# EAGLE board alert-rev8-3v (EAGLE 7.4.0)
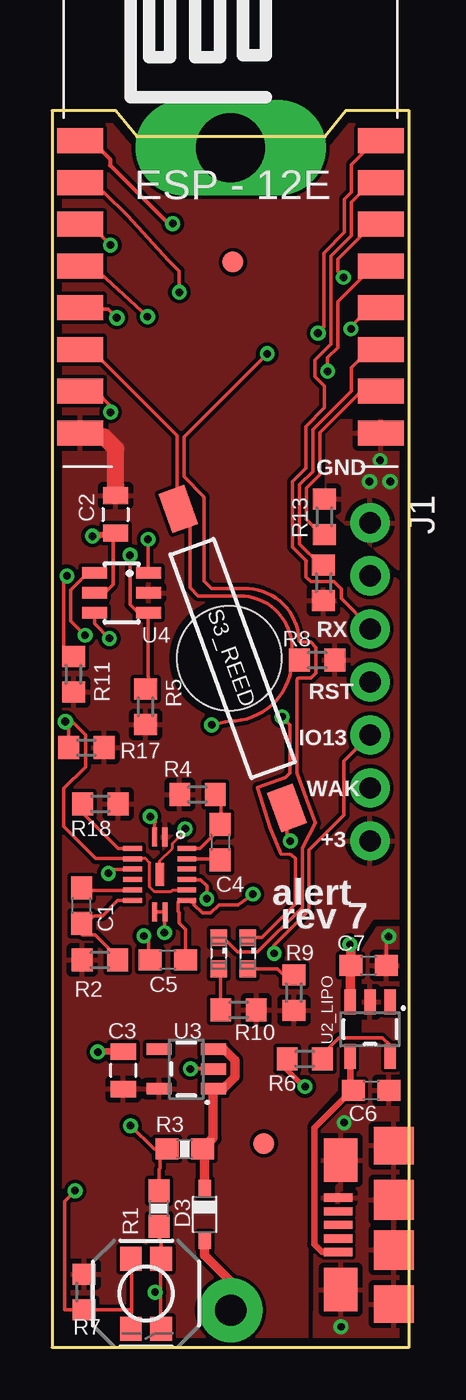
[diagram p0: board, top side]
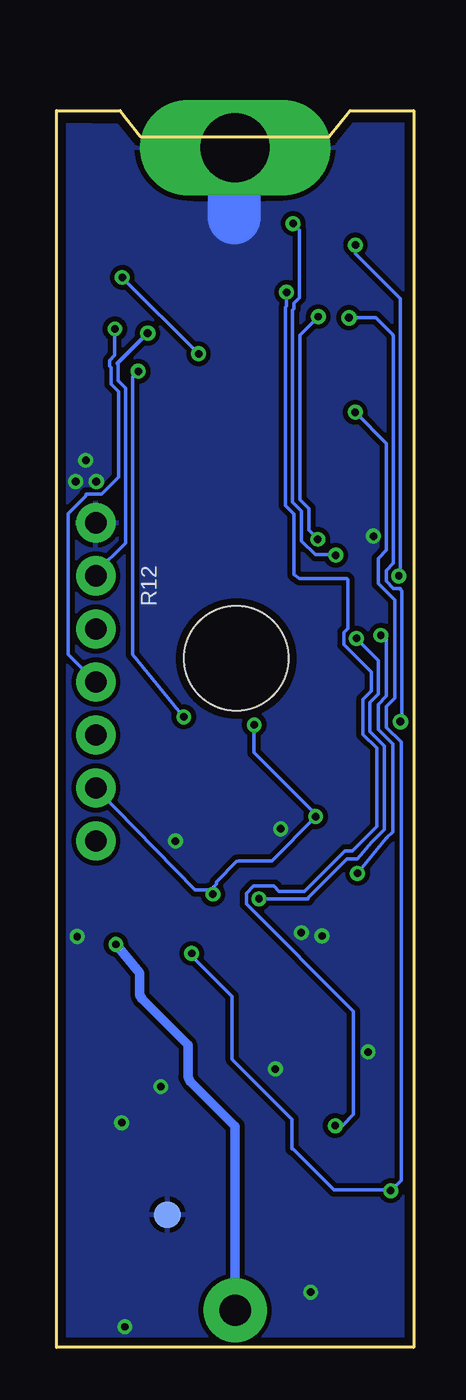
[diagram p1: board, bottom side, seen from below]

Size 17.12 x 59.25 mm. Coordinates in mm from the lower left corner, seen from the top.
Outline: 0,0 17.12,0 17.12,59.25 14.07,59.25 13.08,57.99 4.06,57.99 3.05,59.25 0,59.25 0,0
Copper layers (1*16): Top 0.0356mm / dielectric 1.5011mm / Bottom 0.0356mm
Design rules "oshpark-2layer *": minimum track width 6mil, minimum drill 13mil, track to track 6mil, track to pad 6mil, pad to pad 6mil, via to via 6mil, smd to smd 6mil, copper to edge 15mil, drill to drill 6mil, minimum pad ring 7mil, minimum via ring 7mil, stop-mask expansion 2.5mil, vias tented up to drill 30mil, thermal gap 10mil
Holes 5 mm at 8.5,33

## Footprints (pad centres in the part's own frame; a part is rotated, then mirrored left to right if it is on the bottom)
C0603 = smd 1.1 x 1: 1 -0.85,0; 2 0.85,0
0805 = smd 0.8 x 1.2: 1 -0.9,0; 2 0.9,0
SOD323_ST = smd 0.8 x 0.6: A 1.25,0; C -1.25,0
FIDUCIAL-1X2 = smd 1 x 1: 1 0,0
1X07_NO_SILK = drill 1.016 pad 1.88: 1 0,0; 2 2.54,0; 3 5.08,0; 4 7.62,0; 5 10.16,0; 6 12.7,0; 7 15.24,0
MICRO-B = smd 0.4 x 1.35: D+ 0,2.675; D- -0.65,2.675; GND 1.3,2.675; ID 0.65,2.675; VCC -1.3,2.675 | smd 1.8 x 1.9: P$1 -3.8,0; P$4 3.8,0 | smd 1.9 x 1.9: P$2 -1.2,0; P$3 1.2,0 | smd 2.1 x 1.6: P$5 -3.1,2.55; P$11 3.1,2.55
SML0603 = smd 0.8 x 0.8: A 0.75,0; C -0.75,0
0603-RES = smd 1.1 x 1: 1 -0.85,0; 2 0.85,0
R0603 = smd 1 x 1.1: 1 -0.85,0; 2 0.85,0
CT10-G1 = smd 2 x 1.3: 1 -7.62,0; 2 7.62,0
TACTILE-SWITCH-SMD = smd 1.15 x 1.05: 1 -1.675,0.725; 2 -1.675,-0.725; 3 1.675,0.725; 4 1.675,-0.725
PAD.03X.05 = smd 1.27 x 1.27: P$1 0,0
ESP12E-SMD = smd 2.2 x 1.2: ADC -7.3,3.8; CH_PD -7.3,1.8; GND 7.1,-8.2; GPIO0 7.1,-2.2; GPIO2 7.1,-4.2; GPIO4 7.1,-0.2; GPIO5 7.1,1.8; GPIO12 -7.3,-4.2; GPIO13 -7.3,-6.2; GPIO14 -7.3,-2.2; GPIO15 7.1,-6.2; GPIO16 -7.3,-0.2; RESET -7.3,5.8; RXD0 7.1,3.8; TXD0 7.1,5.8; VCC -7.3,-8.2
DHVQFN16 = smd 0.24 x 0.9: 1!A 1.02,4.34; 2!A 1.52,0.74; GND 1.02,0.74 | smd 0.9 x 0.24: 1!Q -0.03,2.79; 1!RD -0.03,3.29; 1B -0.03,3.79; 1CEXT 2.57,3.29; 1Q 2.57,2.79; 1RC 2.57,3.79; 2!Q 2.57,2.29; 2!RD 2.57,1.79; 2B 2.57,1.29; 2CEXT -0.03,1.79; 2Q -0.03,2.29; 2RC -0.03,1.29 | smd 0.4 x 1.1: PAD 1.27,2.54 | smd 0.25 x 0.9: VCC 1.52,4.34
SOT23-5 = smd 0.55 x 1.2: 1 -0.95,-1.3; 2 0,-1.3; 3 0.95,-1.3; 4 0.95,1.3; 5 -0.95,1.3
SOT23-6 = smd 0.55 x 1.2: 1 0.95,1.3; 2 0,1.3; 3 -0.95,1.3; 4 -0.95,-1.3; 5 0,-1.3; 6 0.95,-1.3
BATTERY-AA-PTH = drill 1.5 pad 3.048: P$1 -27.85,0 | drill 3.302 pad 4.572 long: P$2 27.85,0

## Placement (x,y rotation side)
C1  100nf  [C0603]  1.42,21.15 90 top
C2  47uf  [0805]  3.04,39.9 270 top
C3  47uf  [0805]  3.41,13.27 90 top
C4  100nf  [C0603]  8.05,24.19 270 top
C5  100nf  [C0603]  5.55,18.56 180 top
C6  4.7uf  [C0603]  15.29,12.32 0 top
C7  4.7uf  [C0603]  15.16,18.29 0 top
D3  BAT60J  [SOD323_ST]  7.31,6.36 270 top
FD1  FIDUCIAL1X2  [FIDUCIAL-1X2]  10.15,9.77 0 top
FD2  FIDUCIAL1X2  [FIDUCIAL-1X2]  8.66,51.99 0 top
J1  [1X07_NO_SILK]  15.24,39.5 270 top
J3  [MICRO-B]  16.38,5.87 90 top
LED2  [SML0603]  9.38,18.88 270 top
LED3  [SML0603]  7.98,18.88 270 top
R1  1M  [0603-RES]  5.13,6.65 90 top
R2  200k  [R0603]  2.29,18.56 180 top
R3  1M  [0603-RES]  6.35,9.5 0 top
R4  200k  [R0603]  6.97,26.49 180 top
R5  10k  [R0603]  4.48,30.69 270 top
R6  2k  [R0603]  12.12,13.82 0 top
R7  10k  [R0603]  1.54,2.65 270 top
R8  200k  [R0603]  12.7,32.92 0 top
R9  330ohm  [R0603]  11.59,16.99 90 top
R10  330ohm  [R0603]  8.94,16.17 180 top
R11  10k  [R0603]  1.03,32.25 270 top
R12  10k  [R0603]  13.02,36.62 90 top
R13  10k  [R0603]  13.04,39.78 270 top
R17  10k  [R0603]  1.65,28.73 0 top
R18  10k  [R0603]  2.31,26.04 0 top
S3_REED  REED-SWITCH-CT10-1530-G1  [CT10-G1]  8.65,33 290 top
S_CTRL  SWITCH-MOMENTARY-2SMD-REDUNDANT  [TACTILE-SWITCH-SMD]  4.5,2.57 270 top
TP1  TEST-POINT3X5  [PAD.03X.05]  11.81,6.35 0 bottom
U1  [ESP12E-SMD]  8.65,52 0 top
U2  74HC123N  [DHVQFN16]  3.89,20.12 0 top
U2_LIPO  MCP73831  [SOT23-5]  15.24,15.24 180 top
U3  [SOT23-5]  6.43,13.34 90 top
U4  SN74LVC1G332  [SOT23-6]  3.33,36.14 90 top
U$10  BATTERY-2TERM-PTH  [BATTERY-AA-PTH]  8.56,29.62 90 top

## Library data of the parts
C1 C4-C7 R2 R4-R13 R17 R18 = rcl
C2 C3 R1 R3 = SparkFun-Passives
D3 = diode
FD1 FD2 = SparkFun-Aesthetics
J1 J3 TP1 U1-U4 U$10 = alert
LED2 LED3 = led
S3_REED = switch-reed; MF: COTO TECHNOLOGY; MPN: CT10-1530-G1; OC_FARNELL: 1081696
S_CTRL = alert; PROD_ID: SWCH-08247
U2_LIPO = SparkFun-PowerIC; PROD_ID: IC-09995

## Nets
A_N: R13.2 U1.GPIO15
BTLD: J1.4 U1.GPIO0
CLR: R17.1 U1.GPIO14 U2.1!RD U2.2!RD
CTRL: J1.5 R7.2 S_CTRL.2 S_CTRL.4 U1.GPIO13
GND-ISO: C2.2 C3.2 C5.2 C6.2 C7.2 J1.1 J3.GND J3.P$1 J3.P$2 J3.P$3 J3.P$4 J3.P$5 J3.P$11 R1.1 R6.1 R13.1 S3_REED.2 S_CTRL.1 S_CTRL.3 TP1.P$1 U1.GND U2.2!A U2.GND U2.PAD U2_LIPO.2 U3.2 U4.2 U$10.P$2
LED2: LED2.C U1.GPIO4
LED3: LED3.C U1.GPIO5
N$1: R18.1 U2.1B
N$2: J1.3 U1.RXD0
N$3: R6.2 U2_LIPO.5
N$4: C1.1 R2.1 U2.2RC
N$5: R11.1 U1.CH_PD
N$9: C4.1 R4.1 U2.1RC
N$10: LED2.A R9.2
N$11: C4.2 U2.1CEXT
N$13: U2.1!Q U4.1
N$14: U2.2!Q U4.3
N$16: LED3.A R10.2
N$18: R12.2 U1.GPIO2
N$23: C1.2 U2.2CEXT
REED: C5.1 J1.6 R8.1 S3_REED.1 U1.GPIO12 U2.1!A U2.2B
RESET: R5.1 U1.RESET U4.4
RTC_RST: U1.GPIO16 U4.6
TX: J1.2 U1.TXD0
V_BATT: C7.1 D3.A U2_LIPO.3 U$10.P$1
V_BATT_DIV: R1.2 R3.1 U1.ADC
V_BATT_PROT: D3.C R3.2 U3.1 U3.3
VCC: C6.1 J3.VCC U2_LIPO.4
VCC-ISO: C2.1 C3.1 J1.7 R2.2 R4.2 R5.2 R7.1 R8.2 R9.1 R10.1 R11.2 R12.1 R17.2 R18.2 U1.VCC U2.VCC U3.5 U4.5

## Tracks (layer width: path | path; a pad name or v marks a point on that pad's centre or on a via)
A_N
  Top 0.178: U1.GPIO15 14.81,45.8 12.83,43.81 12.83,41.83 12.8,41.78 12.19,41.17 12.19,39.65 12.9,38.94 R13.2
BTLD  (via drill 0.36)
  Top 0.178: 15.14,49.81 U1.GPIO0 | 15.11,49.73 U1.GPIO0 | v14.33,48.79 14.33,48.9 15.09,49.66 U1.GPIO0
  Bottom 0.178: v14.33,48.79 14.33,47.52 14.58,47.27 14.58,47.02 14.5,46.94 14.5,46.15 14.15,45.8 14.15,41.68 14.96,40.87 15.7,40.87 15.72,40.79 16.56,39.95 16.56,33.2 J1.4
CLR  (via drill 0.38)
  Top 0.152: U2.1!RD 4.47,23.42 4.67,23.22 4.67,22.05 4.9,21.82 5.69,21.82 5.77,21.89 6.45,21.89 U2.2!RD
  Top 0.178: 1.98,49.81 1.37,49.81 U1.GPIO14 2.01,49.73 2.69,49.73 v3.1,49.33 | U2.1!RD 3.79,23.42 2.08,23.42 0.56,24.94 0.56,26.77 1.6,27.81 1.6,29.34 0.96,29.97 0.9,30 0.7,30 v0.64,29.97 0.7,29.9 0.8,29.8 0.8,28.8 R17.1 0.81,28.73
  Bottom 0.178: v3.1,49.33 1.8,49.33 0.99,48.51 0.96,48.44 0.96,37.57 1.32,37.21 1.32,36.7 0.96,36.35 0.64,36.35 0.61,36.27 0.56,36.22 0.56,30.05 v0.64,29.97
CTRL  (via drill 0.36, 0.36 pad 0.71)
  Top 0.178: 1.37,45.8 U1.GPIO13 2.1,45.8 2.8,45.1 v2.8,44.8 | 3.7,4.3 S_CTRL.2 3.8,4.2 3.8,1.8 | 3.8,1.8 3.8,0.9 S_CTRL.4 | v1.1,7.5 0.6,7 0.6,1.8 1.8,1.8 R7.2 1.9,1.8 3.8,1.8 | v10.64,18.87 10.64,19.25 12.32,20.93 12.32,23.82 13.99,25.5 13.99,28.09 J1.5
  Bottom 0.178: v2.8,44.8 1.3,43.3 1.3,38.2 1.7,37.8 1.7,36.6 0.9,35.8 0.9,31.1 1.3,30.7 1.3,29.7 0.6,29 0.6,8 v1.1,7.5 | 1.07,7.42 v1.1,7.5 | 10.64,18.8 v10.64,18.87 10.62,18.72 8.71,16.82 8.71,13.84 8.69,13.77 5.84,10.92 5.84,9.5 5.77,9.47 3.83,7.54 1.17,7.54 v1.1,7.5
GND-ISO  (via drill 0.36, 0.36 pad 0.53, 0.36 pad 0.71, 0.38)
  Top 0.152: v6.38,24.84 6.38,24.74 5.77,24.13 5.77,23.9 5.16,23.29 U2.PAD
  Top 0.178: 3.2,38.86 C2.2 2.92,38.73 2.92,36.55 2.52,36.14 U4.2 | U2.2!A 5.38,20.85 4.93,20.85 U2.GND | 5.41,20.78 U2.2!A | 5.2,2.62 5.2,0.9 S_CTRL.3 | 5.2,2.62 5.2,4.2 5.21,4.24 S_CTRL.1 5.23,4.32 5.23,5.13 5.13,5.23 R1.1 | 5.03,18.49 C5.2 | 4.67,18.64 C5.2 | v5.38,19.86 5.38,20.73 U2.2!A | C5.2 4.62,18.69 4.62,19.56 v4.39,19.71 | S3_REED.2 11.26,24.42 v11.42,24.26 | 5.2,2.62 4.95,2.62 v4.94,2.64 | v16.13,19.68 16.01,19.56 C7.2
  Top 0.203: U3.2 v6.63,13.34
  Top 0.229: v12.12,12.49 v12.12,12.5 12.04,12.5 11.28,13.26 R6.1
  Top 0.305: C2.2 1.93,38.87 v1.93,38.86 | C3.2 2.18,14.17 v2.18,14.15
  Top 0.406: 15.27,43.79 U1.GND
  Bottom 2.54: U$10.P$2 8.61,57.48 8.61,54.1
  other vias: 15.72,42.49 16.21,41.48 15.21,41.48 14,10.76 13.85,0.98
  pour Bottom (isolate 0.229): 0,58.6 3.51,58.6 7.11,54.81 10.57,54.81 13.72,58.55 17.12,58.6 17.12,0 0,0
  pour Top: 13.18,44.4 13.14,40.26 17.12,36.82 17.12,44.4
  pour Top: 17.12,20.09 17.12,0 12.57,0 12.65,10.49 14.58,12.37 14.58,14.43 14.91,14.43 14.91,19.02 15.62,20.09
LED2  (via drill 0.36)
  Top 0.178: U1.GPIO4 | 15.24,51.79 15.67,51.79 U1.GPIO4 | 15.21,51.71 U1.GPIO4 | 15.19,51.64 U1.GPIO4 | 9.4,19.63 LED2.C 9.47,19.63 10.06,19.63 11.66,21.23 11.66,23.42 11.48,23.6 11.4,23.62 10.97,23.65 10.44,24.92 9.86,26.82 11.18,27.3 11.4,27.51 11.4,29.82 v11.02,30.2 | v13.21,46.76 13.21,47.42 13.69,47.9 13.69,50.09 15.16,51.56 U1.GPIO4
  Bottom 0.178: v11.02,30.2 13.49,33.2 13.49,46.48 v13.21,46.76
LED3  (via drill 0.36)
  Top 0.178: U1.GPIO5 | 15.24,53.8 15.67,53.8 U1.GPIO5 | LED3.C 8.03,19.66 8.18,19.66 8.89,18.95 9.86,18.95 11.99,21.08 11.99,23.9 12.01,23.98 12.62,25.12 12.19,26.26 11.73,27.51 11.73,31.95 11.76,32.03 11.84,32.05 12.39,32.05 12.65,32.31 12.65,33.53 12.39,33.78 11.99,33.78 11.84,33.83 11.84,33.88 arc90 9.17,36.35 | v10.31,47.6 6.33,43.61 6.33,41.71 7.26,40.77 7.29,40.69 7.29,36.7 7.64,36.35 9.17,36.35 | v13.97,51.26 13.69,51.54 13.69,52.12 15.21,53.65 15.21,53.72 U1.GPIO5 | 9.27,36.35 9.17,36.35
  Bottom 0.178: v13.97,51.26 v10.31,47.6
N$1
  Top 0.178: R18.1 1.47,26.04 1.47,25.6 3.17,23.9 3.83,23.9 U2.1B
N$2
  Top 0.178: 15.24,55.8 U1.RXD0 | 15.16,55.73 15.21,55.73 U1.RXD0 | U1.RXD0 15.14,55.65 14.35,54.86 14.35,53.26 13.36,52.27 13.36,48.06 12.6,47.3 12.6,46.51 13.06,46.05 13.06,45.01 12.17,44.12 12.17,42.11 11.53,41.48 11.53,38.33 12.19,37.67 12.17,37.59 12.17,36.91 12.39,36.68 13.51,36.68 13.87,36.32 13.87,35.87 15.24,34.49 J1.3
N$3
  Top 0.178: R6.2 12.95,13.82 12.95,14.05 13.74,14.83 15.82,14.83 16.18,14.48 U2_LIPO.5
N$4
  Top 0.178: R2.1 3.12,18.57 3.12,18.69 2.06,19.76 1.45,19.76 1.42,19.79 C1.1 1.5,20.34 1.65,20.34 1.96,20.65 2.03,20.68 2.41,20.68 3.15,21.41 3.83,21.41 U2.2RC
N$5  (via drill 0.36 pad 0.53)
  Top 0.178: v2.79,52.81 1.98,53.62 1.98,53.8 1.37,53.8 U1.CH_PD | v0.71,36.96 0.56,36.96 0.56,33.1 1.02,33.1 R11.1
  Bottom 0.178: v2.79,52.81 2.79,52.4 0.64,50.24 0.64,37.03 v0.71,36.96
N$9
  Top 0.178: 6.48,23.9 U2.1RC 6.5,23.9 7.1,23.9 8,24.8 C4.1 8.1,24.9 8.1,26.2 7.9,26.4 R4.1
N$10
  Top 0.178: R9.2 11.58,17.91 11.02,17.91 10.79,18.14 10.11,18.14 LED2.A
N$11
  Top 0.178: C4.2 8.26,22.96 8.23,22.99 7.7,22.99 7.7,23.4 U2.1CEXT 6.48,23.42
N$13  (via drill 0.36 pad 0.71)
  Top 0.178: v1.57,34.11 0.89,34.8 0.89,36.27 1.7,37.08 2.01,37.08 U4.1 | 3.83,22.91 U2.1!Q 3.8,22.9 2.8,22.9 2.7,22.8 v2.7,22.71
  Bottom 0.178: v2.7,22.71 1.3,24.4 | 1.3,24.4 1.29,24.41 | 1.3,24.4 1,24.7 1,28.9 1.7,29.6 1.7,30.8 1.3,31.2 1.3,33.9 1.5,34.1 v1.57,34.11
N$14  (via drill 0.36 pad 0.71)
  Top 0.178: v7.42,21.49 7.42,22.1 7.11,22.4 6.48,22.4 U2.2!Q | v2.74,33.96 2.03,34.67 U4.3
  Bottom 0.178: 5.08,21.49 5.1,21.49 | 5.1,21.49 v7.42,21.49 | 1.4,24.8 | 1.4,24.8 1.4,28.8 2.1,29.5 2.1,30.9 1.7,31.3 1.7,32.9 2.7,33.9 v2.74,33.96 | 5.1,21.49 5.1,21.5 3.2,23.4 2.7,23.4 2,24.2 1.9,24.3 1.4,24.8 | 1.4,24.8
N$16
  Top 0.178: 8.08,18.09 8.08,16.2 R10.2 | 8.13,18.14 8.08,18.09 | 8.08,18.09 8,18.11 LED3.A
N$18
  Top 0.178: R12.2 13.01,37.47 12.88,37.47 11.86,38.48 11.86,41.33 12.5,41.96 12.5,43.97 14.35,45.82 14.35,46.94 15.21,47.8 U1.GPIO2
N$23
  Top 0.178: C1.2 1.42,21.92 1.45,21.89 3.83,21.89 U2.2CEXT
REED  (via drill 0.36 pad 0.71)
  Top 0.178: U1.GPIO12 1.37,47.8 1.88,47.8 5.99,43.69 5.99,40.23 S3_REED.1 | 5.66,39.85 S3_REED.1 | 5.61,39.78 S3_REED.1 | U2.1!A 4.9,25.12 4.95,25.17 v4.7,25.43 | 6.81,21.39 6.78,21.41 6.48,21.41 U2.2B | 12,32.9 R8.1 | 6.5,40.1 6.1,40.1 S3_REED.1 | 12,33 R8.1 | 5.6,39.7 S3_REED.1 | S3_REED.1 6.34,40.16 6.6,39.9 6.6,36.4 7,36 8.98,36 arc-90 11.51,33.48 11.51,32.92 R8.1 | U2.2B 6.8,21.3 6.8,21.2 7.2,20.8 7.6,20.8 8,21.2 8.9,21.2 v9.63,21.71 | 6.76,18.44 C5.1 | U2.2B 6.4,21.39 6.1,21.39 6.04,21.34 6.04,20.88 6.1,20.83 6.1,20.32 6.4,20.02 6.4,18.64 C5.1 | 6.35,18.49 C5.1 | 6.3,18.19 6.3,18.44 C5.1 | v7.64,29.82 8.51,30 arc90 11.51,32.99 11.95,32.99 arc-90 R8.1
  Bottom 0.178: 4.7,25.5 v4.7,25.43 | v4.7,25.43 4.7,25.4 6.8,23.3 8.4,23.3 8.48,23.27 9.45,22.3 9.45,22.2 9.63,22.02 9.63,22 9.73,21.89 9.73,21.82 v9.63,21.72 v9.63,21.71 9.8,21.92 10.49,21.92 J1.6 | v7.64,29.82 7.64,28.5 4.72,25.58 v4.7,25.43
RESET  (via drill 0.36 pad 0.71)
  Top 0.178: v3.73,37.95 3.73,35.59 4.12,35.2 4.62,35.2 U4.4 | 1.91,57.81 1.37,57.81 U1.RESET | 4.62,35.1 U4.4 | 4.57,35.03 U4.4 | U4.4 4.6,34.95 4.6,32.16 4.62,32.08 4.62,31.73 4.65,31.65 4.76,31.53
  Top 0.203: v5.78,53.84 5.78,53.86 5.55,53.86 2.77,56.63 2.77,56.93 1.95,57.75 U1.RESET
  Top 0.457: R5.1 4.76,31.55 4.76,31.53
  Bottom 0.178: v3.73,37.95 3.76,37.97 4.72,37.97 5.38,38.63 5.38,40.05 5.81,40.48 5.81,49.7 5.75,49.76 5.75,50.02 5.48,50.29 5.48,53.52 5.78,53.82 v5.78,53.84
RTC_RST  (via drill 0.36 pad 0.71)
  Top 0.178: 1.98,51.79 1.37,51.79 U1.GPIO16 2.01,51.71 v4.57,49.38 | v4.6,38.71 4.6,37.08 U4.6
  Bottom 0.178: v4.57,49.38 5.46,48.49 5.46,40.62 5.03,40.18 5.03,39.14 v4.6,38.71
TX  (via drill 0.38 pad 0.53)
  Top 0.178: 12.95,48.77 v12.75,48.59 13.03,48.87 13.03,52.43 14.02,53.42 14.02,55.02 14.35,55.35 14.35,56.67 15.44,57.76 U1.TXD0 15.49,57.81
  Top 0.203: v12.75,48.59 13.01,48.59
  Bottom 0.178: 14.2,47.14 14.17,47.07 14.17,46.3 13.82,45.95 13.82,38.53 15.21,37.13 | 15.37,36.98 15.21,37.13 | J1.2 15.21,36.96 15.21,37.13
  Bottom 0.203: 14.2,47.14 v12.75,48.59
V_BATT  (via drill 0.36)
  Top 0.178: 14.3,16.56 U2_LIPO.3 | C7.1
  Top 0.457: U$10.P$1 8.56,3.17 7.32,4.42 D3.A | U2_LIPO.3 14.3,16.64 14.3,18.21 C7.1 14.31,19.3 v14.28,19.3
  Bottom 0.457: v14.28,19.3 13.13,17.93 13.13,16.89 13.03,16.69 10.82,14.48 10.82,12.95 10.72,12.75 8.56,10.59 U$10.P$1
V_BATT_DIV  (via drill 0.36 pad 0.71)
  Top 0.178: R1.2 5.13,8.53 5.18,8.59 5.18,9.45 5.23,9.5 R3.1 4.88,9.5 v3.76,10.62 | 2.03,55.78 1.37,55.78 U1.ADC 2.03,55.73 2.44,55.32 2.49,55.32 3.61,54.2 5.59,52.07 6.1,51.56 v6.1,50.55
  Bottom 0.178: v6.1,50.55 6.1,49.89 6.15,49.84 6.15,40.34 5.74,39.93 5.74,37.03 5.49,36.83 3.2,36.83 3.15,36.78 3.15,34.44 3.35,34.24 3.35,33.68 2.03,32.36 2.03,31.45 2.44,31.04 2.44,29.36 1.78,28.7 1.78,24.94 2.95,23.77 3.3,23.77 5.23,21.84 6.45,21.84 6.71,22.1 7.67,22.1 8.03,21.74 8.03,21.23 2.9,16.1 2.9,11.15 3.43,10.62 v3.76,10.62
V_BATT_PROT
  Top 0.457: D3.C 7.32,9.47 7.29,9.5 R3.2 7.39,9.7 7.72,10.03 7.72,12.37 U3.1 7.95,12.39 8.2,12.39 8.76,12.95 8.76,13.74 8.23,14.28 7.75,14.28 U3.3
VCC
  Top 0.305: U2_LIPO.4 14.3,13.92 14.3,12.34 14.33,12.32 C6.1 14.25,12.19 12.57,10.52 12.57,4.93 12.93,4.57 13.59,4.57 J3.VCC
VCC-ISO
  Top 0.178: U1.VCC 2.63,43.47 | U2.VCC | 11.63,16.15 R9.1
  Top 0.813: 2.13,43.61 2.49,43.61 2.63,43.47 3.05,43.05 3.05,41.27 C2.1
  pour Top (isolate 0.178): 0,58.57 17.12,58.57 17.12,44.78 12.78,44.78 12.78,39.85 17.12,36.25 17.2,20.57 15.37,20.57 14.48,19.3 14.48,17.27 13.69,15.44 13.69,12.4 12.22,10.79 12.22,0 0,-0.03

## Text on the board
tNames: GND | RX | RST | IO13 | WAK | +3 | alert | rev 7
200bmp: GND | TX | RX | BTLD | GPIO13 | WAKE | +3